# Altium PCB esp32v4.PcbDoc (part 3 of 3)
Units mm, origin at the board's own origin, x right, y up, seen from the top; angles counter-clockwise.
Board outline 100.25 x 100.25 mm, 2 copper layers (Top Layer, Bottom Layer), stack 1.536 mm thick; 107 components, 81 nets, 416 pads, 1990 vias.
Unrouted connection lines stored in the file: 16.
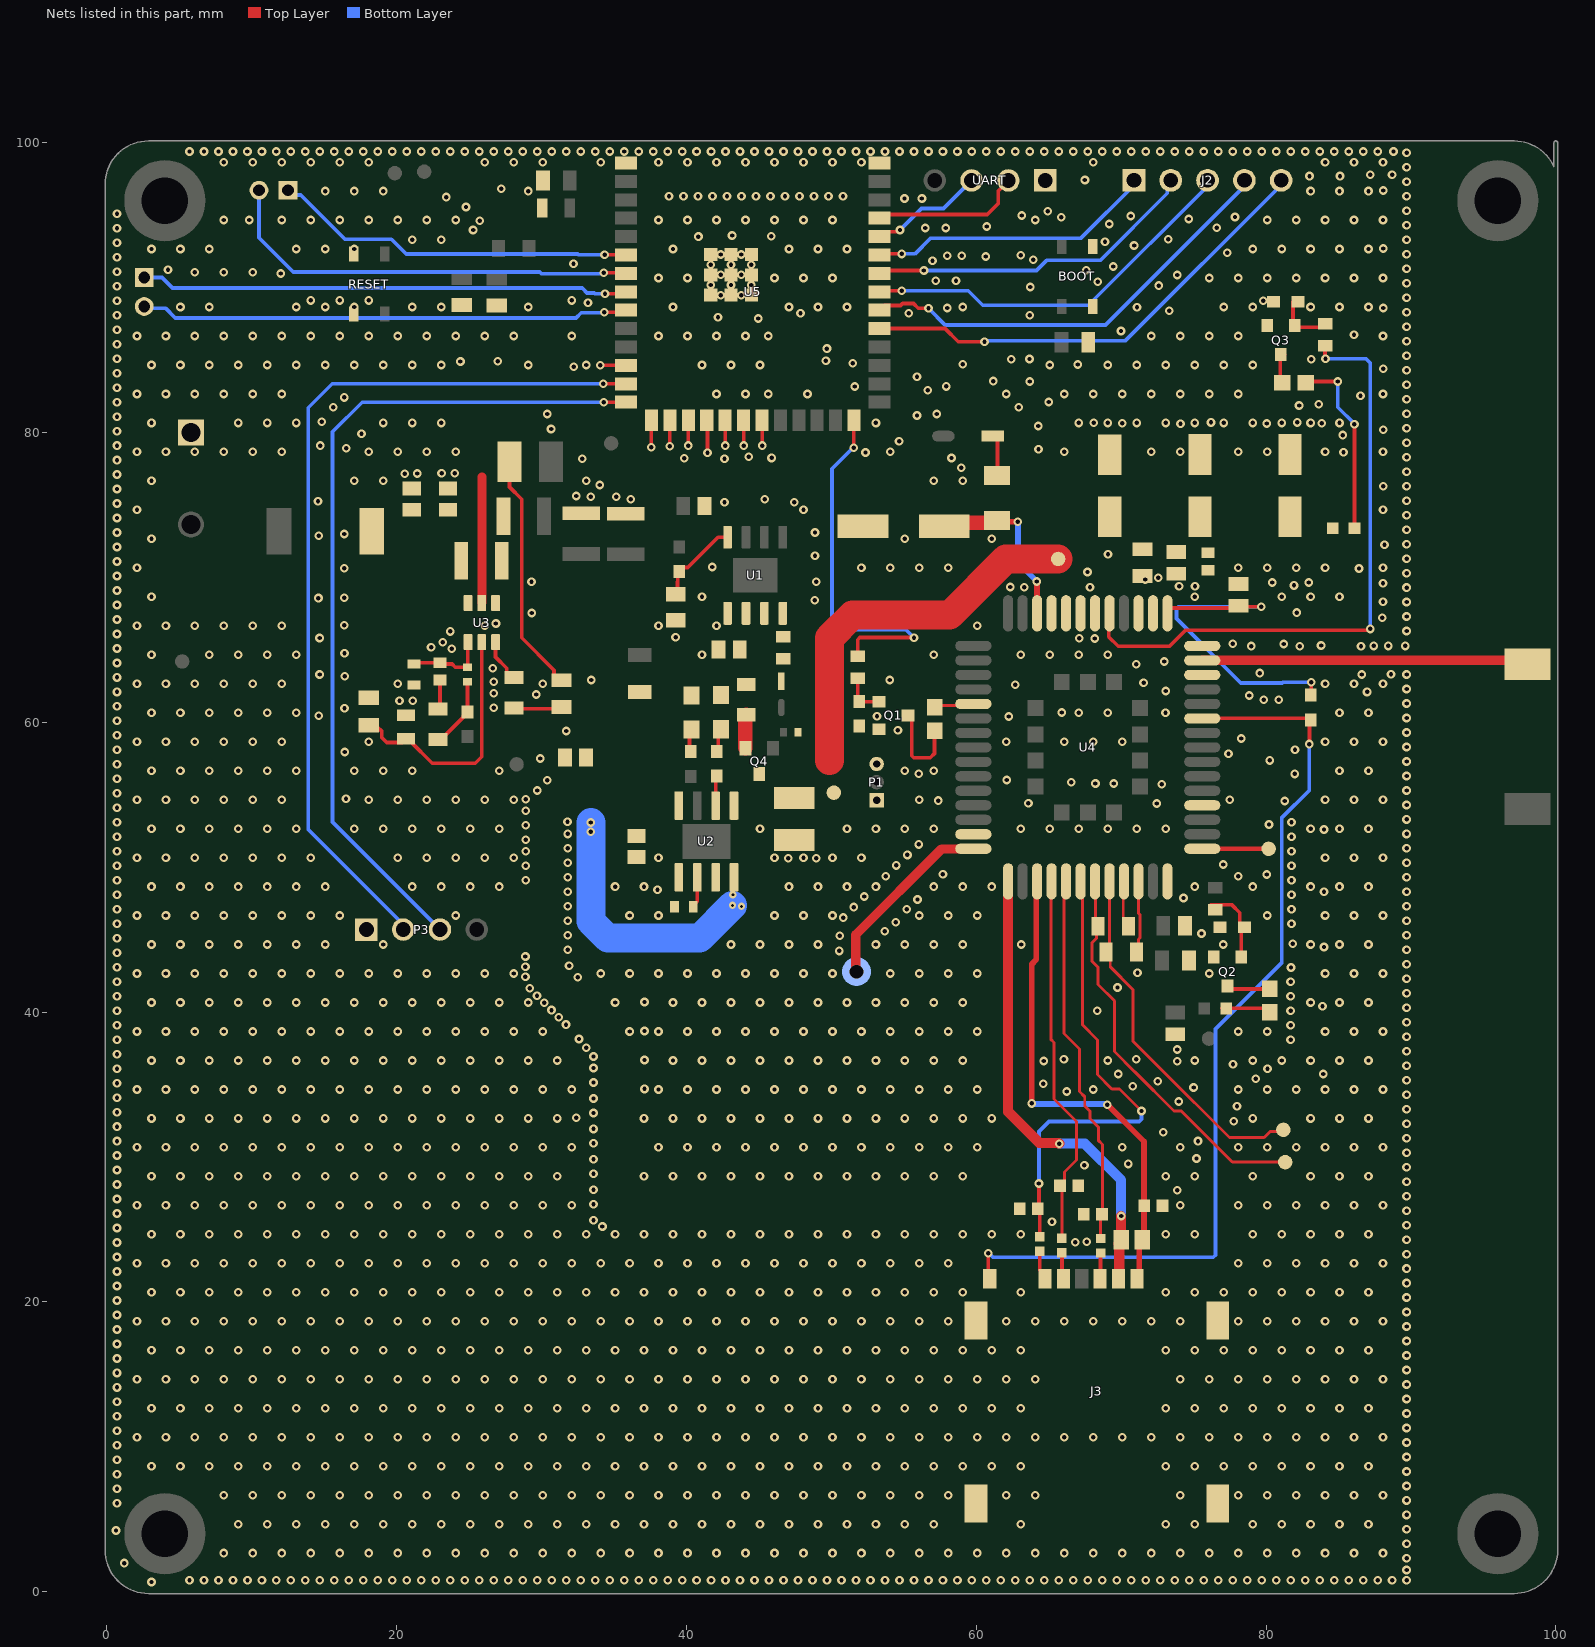
[diagram p2: the nets of this part, all layers, seen from the top]

## Via types
v1: diameter 0.6, hole 0.3, Top Layer to Bottom Layer, tented both sides, 1978 vias
v2: diameter 0.6, hole 0.3, Top Layer to Bottom Layer, tented bottom, 8 vias
v3: diameter 0.5, hole 0.2, Top Layer to Bottom Layer, tented both sides, 3 vias
v4: diameter 0.94, hole 0.94, Top Layer to Bottom Layer, tented both sides, 1 vias

## Nets (pads, with @x,y where several pads share a name; then routed paths per layer and width w, separated by ;. In a path a pad name is that pad's centre, name@x,y a point inside that pad or via, vN(x,y) a via of type N, cw(c..) or ccw(c..) an arc to the next point about the centre after c; other vN are vias at no path point) (continued)
GND: BOOT.3 BOOT.4 C1.2 C2.2 C3.2 C4.2 C5.2 C7.2 C8.2 C9.2 C10.2 C11.2 C12.2 C14.1 C15.2 C16.2 C17.2 C18.2 C19.2 C20.1 C21.1 C22.1 C23.2 C24.2 C25.2 C26.2 C27.2 C29.2 C30.2 C31.1 C32.2 C33.2 C34.2 J1.1 J3.G1 J3.G2 J3.G3 J3.G4 P1.1 P3.1 Q1.2 Q2.2 Q3.2 R3.2 R6.2 R12.2 R13.1 R16.2 R29.2 R30.2 R32.2 RESET.3 RESET.4 U1.1 U2.1 U2.3 U3.1 U4.14 U4.27 U4.31 U4.40 U4.42 U4.44 U4.45 U4.48 U4.49 U5.1 U5.40 U5.41 UART.1
  other v1: 3.075,0.665 5.7,0.8 6.7,0.8 7.7,0.8 8.7,0.8 9.7,0.8 10.7,0.8 11.7,0.8 12.7,0.8 13.7,0.8 14.7,0.8 15.7,0.8 16.7,0.8 17.7,0.8 18.7,0.8 19.7,0.8 20.7,0.8 21.7,0.8 22.7,0.8 23.7,0.8 24.7,0.8 25.7,0.8 26.7,0.8 27.7,0.8 28.7,0.8 29.7,0.8 30.7,0.8 31.7,0.8 32.7,0.8 33.7,0.8 34.7,0.8 35.7,0.8 36.7,0.8 37.7,0.8 38.7,0.8 39.7,0.8 40.7,0.8 41.7,0.8 42.7,0.8 43.7,0.8 44.7,0.8 45.7,0.8 46.7,0.8 47.7,0.8 48.7,0.8 49.7,0.8 50.7,0.8 51.7,0.8 52.7,0.8 53.7,0.8 54.7,0.8 55.7,0.8 56.7,0.8 57.7,0.8 58.7,0.8 59.7,0.8 60.7,0.8 61.7,0.8 62.7,0.8 63.7,0.8 64.7,0.8 65.7,0.8 66.7,0.8 67.7,0.8 68.7,0.8 69.7,0.8 70.7,0.8 71.7,0.8 72.7,0.8 73.7,0.8 74.7,0.8 75.7,0.8 76.7,0.8 77.7,0.8 78.7,0.8 79.7,0.8 80.7,0.8 81.7,0.8 82.7,0.8 83.7,0.8 84.7,0.8 85.7,0.8 86.7,0.8 87.7,0.8 88.7,0.8 89.7,0.8 89.7,1.5 1.2,1.975 89.7,2.3 8.075,2.665 10.075,2.665 12.075,2.665 14.075,2.665 16.075,2.665 18.075,2.665 20.075,2.665 22.075,2.665 24.075,2.665 26.075,2.665 28.075,2.665 30.075,2.665 32.075,2.665 34.075,2.665 36.075,2.665 38.075,2.665 40.075,2.665 42.075,2.665 44.075,2.665 46.075,2.665 48.075,2.665 50.075,2.665 52.075,2.665 54.075,2.665 56.075,2.665 58.075,2.665 60.075,2.665 62.075,2.665 64.075,2.665 66.075,2.665 68.075,2.665 70.075,2.665 72.075,2.665 74.075,2.665 76.075,2.665 78.075,2.665 80.075,2.665 82.075,2.665 84.075,2.665 86.075,2.665 88.075,2.665 89.7,3.3 0.625,4.225 89.7,4.3 9.075,4.665 11.075,4.665 13.075,4.665 15.075,4.665 17.075,4.665 19.075,4.665 21.075,4.665 23.075,4.665 25.075,4.665 27.075,4.665 29.075,4.665 31.075,4.665 33.075,4.665 35.075,4.665 37.075,4.665 39.075,4.665 41.075,4.665 43.075,4.665 45.075,4.665 47.075,4.665 49.075,4.665 51.075,4.665 53.075,4.665 55.075,4.665 57.075,4.665 63.075,4.665 73.075,4.665 75.075,4.665 79.075,4.665 81.075,4.665 83.075,4.665 85.075,4.665 87.075,4.665 89.7,5.3 0.7,6.1 89.7,6.3 8.075,6.665 10.075,6.665 12.075,6.665 14.075,6.665 16.075,6.665 18.075,6.665 20.075,6.665 22.075,6.665 24.075,6.665 26.075,6.665 28.075,6.665 30.075,6.665 32.075,6.665 34.075,6.665 36.075,6.665 38.075,6.665 40.075,6.665 42.075,6.665 44.075,6.665 46.075,6.665 48.075,6.665 50.075,6.665 52.075,6.665 54.075,6.665 56.075,6.665 58.075,6.665 62.075,6.665 64.075,6.665 74.075,6.665 78.075,6.665 80.075,6.665 82.075,6.665 84.075,6.665 86.075,6.665 88.075,6.665 0.7,7.1 89.7,7.3 0.7,8.1 89.7,8.3 3.075,8.665 5.075,8.665 7.075,8.665 9.075,8.665 11.075,8.665 13.075,8.665 15.075,8.665 17.075,8.665 19.075,8.665 21.075,8.665 23.075,8.665 25.075,8.665 27.075,8.665 29.075,8.665 31.075,8.665 33.075,8.665 35.075,8.665 37.075,8.665 39.075,8.665 41.075,8.665 43.075,8.665 45.075,8.665 47.075,8.665 49.075,8.665 51.075,8.665 53.075,8.665 55.075,8.665 57.075,8.665 59.075,8.665 61.075,8.665 63.075,8.665 73.075,8.665 75.075,8.665 77.075,8.665 79.075,8.665 81.075,8.665 83.075,8.665 85.075,8.665 87.075,8.665 0.7,9.1 89.7,9.3 0.7,10.1 89.7,10.3 2.075,10.665 4.075,10.665 6.075,10.665 8.075,10.665 10.075,10.665 12.075,10.665 14.075,10.665 16.075,10.665 18.075,10.665 20.075,10.665 22.075,10.665 24.075,10.665 26.075,10.665 28.075,10.665 30.075,10.665 32.075,10.665 34.075,10.665 36.075,10.665 38.075,10.665 40.075,10.665 42.075,10.665 44.075,10.665 46.075,10.665 48.075,10.665 50.075,10.665 52.075,10.665 54.075,10.665 56.075,10.665 58.075,10.665 60.075,10.665 62.075,10.665 64.075,10.665 66.075,10.665 68.075,10.665 70.075,10.665 72.075,10.665 74.075,10.665 76.075,10.665 78.075,10.665 80.075,10.665 82.075,10.665 84.075,10.665 86.075,10.665 88.075,10.665 0.7,11.1 89.7,11.3 0.7,12.1 89.7,12.3 3.075,12.665 5.075,12.665 7.075,12.665 9.075,12.665 11.075,12.665 13.075,12.665 15.075,12.665 17.075,12.665 19.075,12.665 21.075,12.665 23.075,12.665 25.075,12.665 27.075,12.665 29.075,12.665 31.075,12.665 33.075,12.665 35.075,12.665 37.075,12.665 39.075,12.665 41.075,12.665 43.075,12.665 45.075,12.665 47.075,12.665 49.075,12.665 51.075,12.665 53.075,12.665 55.075,12.665 57.075,12.665 59.075,12.665 61.075,12.665 63.075,12.665 73.075,12.665 75.075,12.665 77.075,12.665 79.075,12.665 81.075,12.665 83.075,12.665 85.075,12.665 87.075,12.665 0.7,13.1 89.7,13.3 0.7,14.1 89.7,14.3 2.075,14.665 4.075,14.665 6.075,14.665 8.075,14.665 10.075,14.665 12.075,14.665 14.075,14.665 16.075,14.665 18.075,14.665 20.075,14.665 22.075,14.665 24.075,14.665 26.075,14.665 28.075,14.665 30.075,14.665 32.075,14.665 34.075,14.665 36.075,14.665 38.075,14.665 40.075,14.665 42.075,14.665 44.075,14.665 46.075,14.665 48.075,14.665 50.075,14.665 52.075,14.665 54.075,14.665 56.075,14.665 58.075,14.665 60.075,14.665 62.075,14.665 64.075,14.665 74.075,14.665 76.075,14.665 78.075,14.665 80.075,14.665 82.075,14.665 84.075,14.665 86.075,14.665 88.075,14.665 0.7,15.1 89.7,15.3 0.7,16.1 89.7,16.3 3.075,16.665 5.075,16.665 7.075,16.665 9.075,16.665 11.075,16.665 13.075,16.665 15.075,16.665 17.075,16.665 19.075,16.665 21.075,16.665 23.075,16.665 25.075,16.665 27.075,16.665 29.075,16.665 31.075,16.665 33.075,16.665 35.075,16.665 37.075,16.665 39.075,16.665 41.075,16.665 43.075,16.665 45.075,16.665 47.075,16.665 49.075,16.665 51.075,16.665 53.075,16.665 55.075,16.665 57.075,16.665 59.075,16.665 61.075,16.665 63.075,16.665 73.075,16.665 75.075,16.665 77.075,16.665 79.075,16.665 81.075,16.665 83.075,16.665 85.075,16.665 87.075,16.665 0.7,17.1 89.7,17.3 0.7,18.1 89.7,18.3 2.075,18.665 4.075,18.665 6.075,18.665 8.075,18.665 10.075,18.665 12.075,18.665 14.075,18.665 16.075,18.665 18.075,18.665 20.075,18.665 22.075,18.665 24.075,18.665 26.075,18.665 28.075,18.665 30.075,18.665 32.075,18.665 34.075,18.665 36.075,18.665 38.075,18.665 40.075,18.665 42.075,18.665 44.075,18.665 46.075,18.665 48.075,18.665 50.075,18.665 52.075,18.665 54.075,18.665 56.075,18.665 58.075,18.665 62.075,18.665 64.075,18.665 66.075,18.665 68.075,18.665 70.075,18.665 72.075,18.665 74.075,18.665 78.075,18.665 80.075,18.665 82.075,18.665 84.075,18.665 86.075,18.665 88.075,18.665 0.7,19.1 89.7,19.3 0.7,20.1 89.7,20.3 3.075,20.665 5.075,20.665 7.075,20.665 9.075,20.665 11.075,20.665 13.075,20.665 15.075,20.665 17.075,20.665 19.075,20.665 21.075,20.665 23.075,20.665 25.075,20.665 27.075,20.665 29.075,20.665 31.075,20.665 33.075,20.665 35.075,20.665 37.075,20.665 39.075,20.665 41.075,20.665 43.075,20.665 45.075,20.665 47.075,20.665 49.075,20.665 51.075,20.665 53.075,20.665 55.075,20.665 57.075,20.665 59.075,20.665 63.075,20.665 73.075,20.665 75.075,20.665 77.075,20.665 79.075,20.665 81.075,20.665 83.075,20.665 85.075,20.665 87.075,20.665 0.7,21.1 89.7,21.3 0.7,22.1 89.7,22.3 2.075,22.665 4.075,22.665 6.075,22.665 8.075,22.665 10.075,22.665 12.075,22.665 14.075,22.665 16.075,22.665 18.075,22.665 20.075,22.665 22.075,22.665 24.075,22.665 26.075,22.665 28.075,22.665 30.075,22.665 32.075,22.665 34.075,22.665 36.075,22.665 38.075,22.665 40.075,22.665 42.075,22.665 44.075,22.665 46.075,22.665 48.075,22.665 50.075,22.665 52.075,22.665 54.075,22.665 56.075,22.665 58.075,22.665 78.075,22.665 80.075,22.665 82.075,22.665 84.075,22.665 86.075,22.665 88.075,22.665 0.7,23.1 89.7,23.3 0.7,24.1 66.825,24.125 67.625,24.15 89.7,24.3 3.075,24.665 5.075,24.665 7.075,24.665 9.075,24.665 11.075,24.665 13.075,24.665 15.075,24.665 17.075,24.665 19.075,24.665 21.075,24.665 23.075,24.665 25.075,24.665 27.075,24.665 29.075,24.665 31.075,24.665 33.075,24.665 35.075,24.665 37.075,24.665 39.075,24.665 41.075,24.665 43.075,24.665 45.075,24.665 47.075,24.665 49.075,24.665 51.075,24.665 53.075,24.665 55.075,24.665 57.075,24.665 59.075,24.665 61.075,24.665 63.075,24.665 73.075,24.665 75.075,24.665 79.075,24.665 81.075,24.665 83.075,24.665 85.075,24.665 87.075,24.665 0.7,25.1 34.2,25.2 89.7,25.3 65.225,25.525 33.585,25.64 0.7,26.1 89.7,26.3 2.075,26.665 4.075,26.665 6.075,26.665 8.075,26.665 10.075,26.665 12.075,26.665 14.075,26.665 16.075,26.665 18.075,26.665 20.075,26.665 22.075,26.665 24.075,26.665 26.075,26.665 28.075,26.665 30.075,26.665 32.075,26.665 74.075,26.665 78.075,26.665 80.075,26.665 82.075,26.665 84.075,26.665 86.075,26.665 88.075,26.665 33.585,26.74 0.7,27.1 89.7,27.3 73.875,27.7 33.585,27.74 0.7,28.1 89.7,28.3 3.075,28.665 5.075,28.665 7.075,28.665 9.075,28.665 11.075,28.665 13.075,28.665 15.075,28.665 17.075,28.665 19.075,28.665 21.075,28.665 23.075,28.665 25.075,28.665 27.075,28.665 29.075,28.665 31.075,28.665 37.075,28.665 39.075,28.665 41.075,28.665 43.075,28.665 45.075,28.665 47.075,28.665 49.075,28.665 51.075,28.665 53.075,28.665 55.075,28.665 57.075,28.665 59.075,28.665 73.075,28.665 75.075,28.665 79.075,28.665 83.075,28.665 85.075,28.665 87.075,28.665 33.585,28.84 0.7,29.1 89.7,29.3 67.465,29.429 70.5,29.525 33.585,29.84 75.2,29.9 0.7,30.1 89.7,30.3 2.075,30.665 4.075,30.665 6.075,30.665 8.075,30.665 10.075,30.665 12.075,30.665 14.075,30.665 16.075,30.665 18.075,30.665 20.075,30.665 22.075,30.665 24.075,30.665 26.075,30.665 28.075,30.665 30.075,30.665 32.075,30.665 38.075,30.665 40.075,30.665 42.075,30.665 44.075,30.665 46.075,30.665 48.075,30.665 50.075,30.665 52.075,30.665 54.075,30.665 56.075,30.665 58.075,30.665 60.075,30.665 70.075,30.665 74.075,30.665 78.075,30.665 80.075,30.665 82.075,30.665 84.075,30.665 86.075,30.665 88.075,30.665 33.585,30.94 0.7,31.1 75.3,31.1 89.7,31.3 72.9,31.7 33.585,31.94 0.7,32.1 89.7,32.3 77.775,32.475 3.075,32.665 5.075,32.665 7.075,32.665 9.075,32.665 11.075,32.665 13.075,32.665 15.075,32.665 17.075,32.665 19.075,32.665 21.075,32.665 23.075,32.665 25.075,32.665 27.075,32.665 29.075,32.665 31.075,32.665 37.075,32.665 39.075,32.665 41.075,32.665 43.075,32.665 45.075,32.665 47.075,32.665 49.075,32.665 51.075,32.665 53.075,32.665 55.075,32.665 57.075,32.665 59.075,32.665 61.075,32.665 79.075,32.665 83.075,32.665 85.075,32.665 87.075,32.665 32.4,32.7 33.585,33.04 0.7,33.1 89.7,33.3 78,33.5 73.975,33.829 33.585,34.04 0.7,34.1 89.7,34.3 66.25,34.525 2.075,34.665 4.075,34.665 6.075,34.665 8.075,34.665 10.075,34.665 12.075,34.665 14.075,34.665 16.075,34.665 18.075,34.665 20.075,34.665 22.075,34.665 24.075,34.665 26.075,34.665 28.075,34.665 30.075,34.665 32.075,34.665 38.075,34.665 40.075,34.665 42.075,34.665 44.075,34.665 46.075,34.665 48.075,34.665 50.075,34.665 52.075,34.665 54.075,34.665 56.075,34.665 58.075,34.665 60.075,34.665 68.075,34.665 78.075,34.665 80.075,34.665 82.075,34.665 84.075,34.665 86.075,34.665 88.075,34.665 37.1,34.7 75,34.8 70.792,34.894 64.625,35.05 0.7,35.1 33.585,35.14 72.521,35.221 89.7,35.3 79.3,35.4 69.8,35.725 83.95,35.725 0.7,36.1 80.1,36.1 33.585,36.14 89.7,36.3 77.725,36.4 73.875,36.6 64.65,36.625 3.075,36.665 5.075,36.665 7.075,36.665 9.075,36.665 11.075,36.665 13.075,36.665 15.075,36.665 17.075,36.665 19.075,36.665 21.075,36.665 23.075,36.665 25.075,36.665 27.075,36.665 29.075,36.665 31.075,36.665 39.075,36.665 41.075,36.665 43.075,36.665 45.075,36.665 47.075,36.665 49.075,36.665 51.075,36.665 53.075,36.665 55.075,36.665 57.075,36.665 59.075,36.665 69.075,36.665 75.075,36.665 79.075,36.665 81.075,36.665 83.075,36.665 85.075,36.665 87.075,36.665 37.1,36.7 66.05,36.75 71.05,36.75 33.585,36.94 0.7,37.1 89.7,37.3 73.875,37.425 33.085,37.54 0.7,38.1 81.694,38.1 32.585,38.14 89.7,38.3 2.075,38.665 4.075,38.665 6.075,38.665 8.075,38.665 10.075,38.665 12.075,38.665 14.075,38.665 16.075,38.665 18.075,38.665 20.075,38.665 22.075,38.665 24.075,38.665 26.075,38.665 28.075,38.665 30.075,38.665 36.075,38.665 38.075,38.665 40.075,38.665 42.075,38.665 44.075,38.665 46.075,38.665 48.075,38.665 50.075,38.665 52.075,38.665 54.075,38.665 56.075,38.665 58.075,38.665 60.075,38.665 78.075,38.665 80.075,38.665 84.075,38.665 86.075,38.665 88.075,38.665 37.1,38.7 0.7,39.1 81.694,39.1 31.685,39.14 89.7,39.3 31.185,39.64 0.7,40.1 68.35,40.1 81.694,40.1 30.685,40.14 89.7,40.3 83.9,40.4 30.185,40.64 3.075,40.665 5.075,40.665 7.075,40.665 9.075,40.665 11.075,40.665 13.075,40.665 15.075,40.665 17.075,40.665 19.075,40.665 21.075,40.665 23.075,40.665 25.075,40.665 27.075,40.665 29.075,40.665 35.075,40.665 39.075,40.665 41.075,40.665 43.075,40.665 45.075,40.665 47.075,40.665 49.075,40.665 51.075,40.665 53.075,40.665 55.075,40.665 57.075,40.665 59.075,40.665 83.075,40.665 85.075,40.665 87.075,40.665 37.1,40.7 0.7,41.1 81.694,41.1 29.685,41.14 89.7,41.3 29.185,41.64 69.75,41.7 0.7,42.1 81.694,42.1 89.7,42.3 32.5,42.4 28.885,42.44 2.075,42.665 4.075,42.665 6.075,42.665 8.075,42.665 10.075,42.665 12.075,42.665 14.075,42.665 16.075,42.665 18.075,42.665 20.075,42.665 22.075,42.665 24.075,42.665 26.075,42.665 28.075,42.665 34.075,42.665 36.075,42.665 38.075,42.665 40.075,42.665 42.075,42.665 44.075,42.665 46.075,42.665 48.075,42.665 50.075,42.665 54.075,42.665 56.075,42.665 58.075,42.665 60.075,42.665 76.075,42.665 84.075,42.665 86.075,42.665 88.075,42.665 71.125,42.725 81.718,43.076 0.7,43.1 28.885,43.14 31.9,43.2 89.7,43.3 28.885,43.84 0.7,44.1 50.55,44.225 31.8,44.3 89.7,44.3 84,44.5 3.075,44.665 5.075,44.665 7.075,44.665 9.075,44.665 11.075,44.665 13.075,44.665 15.075,44.665 19.075,44.665 43.075,44.665 45.075,44.665 47.075,44.665 49.075,44.665 53.075,44.665 55.075,44.665 57.075,44.665 59.075,44.665 63.104,44.665 77.049,44.665 83.075,44.665 85.075,44.665 87.075,44.665 81.85,44.725 0.7,45.1 50.575,45.275 31.8,45.3 89.7,45.3 75.55,45.425 53.675,45.575 0.7,46.1 81.756,46.1 54.45,46.2 31.8,46.3 89.7,46.3 50.825,46.525 2.075,46.665 4.075,46.665 6.075,46.665 8.075,46.665 10.075,46.665 12.075,46.665 14.075,46.665 16.075,46.665 24.075,46.665 36.075,46.665 38.075,46.665 46.075,46.665 48.075,46.665 50.075,46.665 56.075,46.665 58.075,46.665 60.075,46.665 80.075,46.665 84.075,46.665 86.075,46.665 88.075,46.665 0.7,47.1 55.2,47.1 81.756,47.1 51.55,47.25 31.8,47.3 89.7,47.3 55.95,47.775 74.3,47.875 52.275,47.975 0.7,48.1 81.756,48.1 31.8,48.3 84,48.3 89.7,48.3 38,48.45 3.075,48.665 5.075,48.665 7.075,48.665 9.075,48.665 11.075,48.665 13.075,48.665 15.075,48.665 21.075,48.665 23.075,48.665 25.075,48.665 27.075,48.665 35.075,48.665 37.075,48.665 47.075,48.665 49.075,48.665 51.075,48.665 53.075,48.665 57.075,48.665 59.075,48.665 61.075,48.665 75.075,48.665 79.075,48.665 83.075,48.665 85.075,48.665 87.075,48.665 0.7,49.1 28.9,49.1 81.756,49.1 31.8,49.3 89.7,49.3 53.75,49.375 78.075,49.375 80.05,49.5 57.7,49.525 0.7,50.1 28.9,50.1 81.756,50.1 54.475,50.125 77.041,50.184 31.8,50.3 89.7,50.3 47.025,50.625 48.95,50.625 2.075,50.665 4.075,50.665 6.075,50.665 8.075,50.665 10.075,50.665 12.075,50.665 14.075,50.665 20.075,50.665 22.075,50.665 24.075,50.665 26.075,50.665 28.075,50.665 38.075,50.665 46.075,50.665 48.075,50.665 50.075,50.665 52.075,50.665 84.075,50.665 86.075,50.665 88.075,50.665 55.25,50.85 0.7,51.1 28.9,51.1 81.756,51.1 31.8,51.3 89.7,51.3 56.025,51.575 28.9,51.9 0.7,52.1 81.756,52.1 31.8,52.3 89.7,52.3 84,52.6 3.075,52.665 5.075,52.665 7.075,52.665 9.075,52.665 11.075,52.665 13.075,52.665 17.075,52.665 19.075,52.665 21.075,52.665 23.075,52.665 25.075,52.665 27.075,52.665 45.075,52.665 51.075,52.665 53.075,52.665 55.075,52.665 57.075,52.665 63.075,52.665 65.075,52.665 67.075,52.665 69.075,52.665 71.075,52.665 73.075,52.665 83.075,52.665 85.075,52.665 87.075,52.665 28.9,52.9 80.2,52.95 0.7,53.1 81.756,53.1 31.785,53.14 89.7,53.3 28.9,53.9 0.7,54.1 89.7,54.3 72.45,54.4 63.6,54.425 81.284,54.572 57.375,54.6 2.075,54.665 4.075,54.665 6.075,54.665 8.075,54.665 10.075,54.665 12.075,54.665 18.075,54.665 20.075,54.665 22.075,54.665 24.075,54.665 26.075,54.665 28.075,54.665 56.075,54.665 77.5,54.65 84.075,54.665 86.075,54.665 88.075,54.665 28.9,54.7 16.5,54.725 0.7,55.1 29.7,55.3 89.7,55.3 72.8,55.725 68.225,55.775 69.5,55.775 66.55,55.875 30.4,56 62.1,56.025 0.7,56.1 89.7,56.3 56.025,56.45 81.985,56.441 3.075,56.665 5.075,56.665 7.075,56.665 9.075,56.665 11.075,56.665 13.075,56.665 17.075,56.665 19.075,56.665 21.075,56.665 27.075,56.665 55.075,56.665 57.075,56.665 85.075,56.665 87.075,56.665 0.7,57.1 89.7,57.3 80.263,57.373 29.9,57.5 77.413,57.838 16.425,57.95 0.7,58.1 81.996,58.1 89.7,58.3 2.075,58.665 4.075,58.665 6.075,58.665 8.075,58.665 10.075,58.665 12.075,58.665 18.075,58.665 62.075,58.665 66.075,58.665 68.075,58.665 70.075,58.665 84.075,58.665 86.075,58.665 88.075,58.665 78.293,58.883 0.7,59.1 89.7,59.3 31.7,59.4 54.594,59.45 0.7,60.1 89.7,60.3 62.25,60.4 53.15,60.425 14.625,60.45 3.075,60.665 5.075,60.665 7.075,60.665 9.075,60.665 11.075,60.665 13.075,60.665 67.075,60.665 69.075,60.665 73.066,60.657 85.075,60.665 87.075,60.665 65.9,60.675 16.4,60.975 26.7,61 0.7,61.1 89.7,61.3 20.2,61.5 21.1,61.5 79.848,61.569 80.882,61.569 78.836,61.852 29.625,61.925 26.7,62 0.7,62.1 86.975,62.1 73.088,62.163 89.7,62.3 62.7,62.6 2.075,62.665 4.075,62.665 6.075,62.665 8.075,62.665 10.075,62.665 12.075,62.665 20.075,62.665 30.075,62.665 84.075,62.665 86.075,62.665 88.075,62.665 71.55,62.725 26.7,62.8 33.425,62.925 54.025,62.925 0.7,63.1 16.425,63.175 14.681,63.3 86.6,63.3 89.7,63.3 88.625,63.325 79.567,63.399 26.637,63.737 71.05,64 0.7,64.1 72.976,64.201 3.075,64.665 7.075,64.665 9.075,64.665 11.075,64.665 13.075,64.665 41.075,64.665 57.075,64.665 63.075,64.665 65.075,64.665 67.075,64.665 69.075,64.665 16.4,64.775 23.8,65.075 0.7,65.1 22.375,65.175 78.987,65.263 82.325,65.25 86.55,65.25 87.425,65.275 88.425,65.275 89.6,65.275 83.8,65.3 81.228,65.403 77.7,65.425 23.175,65.525 68.181,65.781 67.1,65.8 14.681,65.825 39.25,65.875 0.7,66.1 23.7,66.275 89.7,66.3 2.075,66.665 4.075,66.665 6.075,66.665 8.075,66.665 10.075,66.665 12.075,66.665 26.075,66.665 38.075,66.665 42.075,66.665 60.075,66.665 16.375,66.7 26.85,66.825 0.7,67.1 88.031,67.225 89.7,67.3 29.331,67.55 82.125,67.575 0.7,68.1 89.7,68.3 88.075,68.325 48.85,68.425 14.6,68.575 16.375,68.6 3.075,68.665 41.075,68.665 75.075,68.665 81.075,68.665 83.075,68.665 85.075,68.665 0.7,69.1 89.7,69.3 63.322,69.325 67.847,69.329 62.357,69.342 74,69.4 75.1,69.4 81.925,69.45 88.075,69.6 80.425,69.65 82.938,69.656 29.306,69.7 48.95,69.7 71.657,69.857 72.569,69.969 0.7,70.1 89.7,70.3 67.675,70.375 86.413,70.623 16.375,70.625 2.075,70.665 52.075,70.665 54.075,70.665 56.075,70.665 58.075,70.665 78.075,70.665 80.075,70.665 82.075,70.665 84.075,70.665 88.075,70.665 41.781,70.725 0.7,71.1 89.7,71.3 48.875,71.5 69.094,71.594 0.7,72.1 88.175,72.25 89.7,72.3 3.075,72.665 55.075,72.665 61.075,72.665 14.625,72.875 16.375,73 0.7,73.1 48.875,73.1 89.7,73.3 0.7,74.1 89.7,74.3 2.075,74.665 48.075,74.665 88.075,74.665 0.7,75.1 42.625,75.2 47.45,75.2 14.575,75.25 89.7,75.3 36.151,75.401 45.4,75.401 33.4,75.575 35.145,75.567 32.4,75.625 0.7,76.1 88.1,76.3 89.7,76.3 34.024,76.383 3.075,76.665 17.075,76.665 19.075,76.665 33.075,76.665 57.075,76.665 59.075,76.665 0.7,77.1 20.55,77.15 21.425,77.175 23.1,77.2 24,77.2 89.7,77.3 58.973,77.563 0.7,78.1 32.8,78.2 42.625,78.2 39.85,78.225 45.875,78.25 58.289,78.248 89.7,78.3 44.301,78.322 52.356,78.62 85.35,78.65 2.075,78.665 4.075,78.665 6.075,78.665 8.075,78.665 10.075,78.665 12.075,78.665 18.075,78.665 20.075,78.665 22.075,78.665 24.075,78.665 54.075,78.665 66.075,78.665 72.075,78.665 74.075,78.665 78.075,78.665 80.075,78.665 84.075,78.665 88.075,78.665 64.3,78.85 16.525,78.925 0.7,79.1 14.725,79.1 89.7,79.3 54.675,79.4 85.3,79.825 17.575,79.925 0.7,80.1 88.1,80.2 30.658,80.248 89.7,80.3 64.275,80.45 74.1,80.6 80.05,80.625 70.075,80.65 83.85,80.65 3.075,80.665 9.075,80.665 11.075,80.665 13.075,80.665 19.075,80.665 21.075,80.665 23.075,80.665 53.075,80.665 67.075,80.665 68.1,80.675 69.075,80.665 71.075,80.665 73.075,80.665 75.075,80.665 77.075,80.665 79.075,80.665 81.075,80.665 83.075,80.665 85.075,80.665 76.2,80.7 82.15,80.7 14.825,80.75 0.7,81.1 55.913,81.175 30.4,81.275 57.282,81.278 89.7,81.3 62.928,81.739 15.625,81.75 82.281,81.869 83.643,81.943 0.7,82.1 65.007,82.107 89.7,82.3 16.375,82.425 86.515,82.543 2.075,82.665 4.075,82.665 6.075,82.665 8.075,82.665 10.075,82.665 12.075,82.665 42.075,82.665 44.075,82.665 45.644,82.665 48.356,82.665 62.075,82.665 66.075,82.665 68.075,82.665 70.075,82.665 72.075,82.665 74.075,82.665 76.075,82.665 78.075,82.665 88.075,82.665 56.65,82.925 0.7,83.1 51.625,83.175 57.928,83.184 89.7,83.3 63.7,83.525 61.184,83.552 55.913,83.85 0.7,84.1 89.7,84.3 88.1,84.4 32.225,84.55 3.075,84.665 5.075,84.665 7.075,84.665 9.075,84.665 11.075,84.665 13.075,84.665 15.075,84.665 17.075,84.665 19.075,84.665 21.075,84.665 23.075,84.665 29.075,84.665 33.075,84.665 41.075,84.665 43.075,84.665 45.075,84.665 65.075,84.665 69.075,84.665 71.075,84.665 73.075,84.665 75.075,84.665 77.075,84.665 79.075,84.665 59.07,84.719 67,84.7 51.475,84.775 24.4,84.9 26.975,84.925 49.625,84.95 62.425,85.05 83.125,85.05 63.675,85.075 0.7,85.1 89.7,85.3 49.694,85.795 0.7,86.1 89.7,86.3 2.075,86.665 4.075,86.665 6.075,86.665 8.075,86.665 10.075,86.665 12.075,86.665 14.075,86.665 16.075,86.665 18.075,86.665 20.075,86.665 22.075,86.665 24.075,86.665 26.075,86.665 28.075,86.665 32.075,86.665 38.075,86.665 40.075,86.665 42.075,86.665 44.075,86.665 45.644,86.665 72.075,86.665 74.075,86.665 76.075,86.665 78.075,86.665 88.075,86.665 86.075,86.753 69.993,87.006 0.7,87.1 89.7,87.3 44.95,87.875 42.175,87.95 0.7,88.1 63.7,88.106 47.875,88.231 55.35,88.231 89.7,88.3 73.327,88.414 58,88.6 88.1,88.6 71.097,88.643 5.075,88.665 7.075,88.665 13.075,88.665 15.075,88.665 17.075,88.665 21.075,88.665 23.075,88.665 29.075,88.665 39.075,88.665 47.075,88.665 49.075,88.665 51.075,88.665 59.075,88.665 77.075,88.665 79.075,88.665 83.075,88.665 85.075,88.665 87.075,88.665 33.2,88.952 0.7,89.1 79.8,89.1 14.075,89.119 16.075,89.119 18.075,89.119 32.075,89.119 89.7,89.3 42.377,89.485 43.777,89.485 63.725,90.05 0.7,90.1 72.597,90.143 41.677,90.185 43.077,90.185 44.477,90.185 89.7,90.3 68.394,90.406 57.2,90.47 58.6,90.47 38.075,90.665 40.075,90.665 46.075,90.665 48.075,90.665 50.075,90.665 76.075,90.665 78.075,90.665 80.075,90.665 82.075,90.665 84.075,90.665 86.075,90.665 88.075,90.665 42.377,90.885 43.777,90.885 73.864,90.877 11.997,90.978 6.075,91.056 8.075,91.056 10.075,91.056 0.7,91.1 67.6,91.2 4.216,91.239 89.7,91.3 69.452,91.465 41.677,91.585 43.077,91.585 44.477,91.585 32.2,91.64 56.985,91.867 63.931,91.919 0.7,92.1 60.65,92.15 58,92.2 59,92.2 63.075,92.23 42.377,92.285 43.777,92.285 89.7,92.3 77.327,92.414 3.075,92.665 5.075,92.665 7.075,92.665 13.075,92.665 15.075,92.665 17.075,92.665 39.075,92.665 47.075,92.665 49.075,92.665 51.075,92.665 79.075,92.665 81.075,92.665 83.075,92.665 85.075,92.665 87.075,92.665 88.1,92.7 70.894,92.906 0.7,93.1 68.883,93.171 21.075,93.297 23.075,93.297 89.7,93.3 73.257,93.343 40.825,93.525 45.85,93.55 43.15,93.6 25.274,93.981 0.7,94.1 56.472,94.114 57.9,94.114 76.597,94.143 60.725,94.225 89.7,94.3 69.177,94.398 25.728,94.628 8.075,94.665 9.819,94.665 12.075,94.665 14.075,94.665 16.075,94.665 18.075,94.665 20.075,94.665 22.075,94.665 24.075,94.665 38.075,94.665 40.075,94.665 42.075,94.665 44.075,94.665 46.075,94.665 48.075,94.665 50.075,94.665 64.075,94.665 80.075,94.665 82.075,94.665 84.075,94.665 86.075,94.665 88.075,94.665 74.657,94.743 65.876,94.864 77.864,94.877 70.656,94.944 63.15,94.975 0.7,95.1 64.925,95.275 89.7,95.3 24.79,95.565 55.05,96.15 56.25,96.15 23.425,96.25 38.8,96.3 39.8,96.3 40.8,96.3 41.8,96.3 42.8,96.3 43.8,96.3 44.8,96.3 45.8,96.3 46.8,96.3 47.8,96.3 48.8,96.3 49.8,96.3 50.8,96.3 89.7,96.3 15.075,96.665 17.075,96.665 19.075,96.665 29.075,96.665 83.075,96.665 85.075,96.665 87.075,96.665 88.1,96.7 27.227,96.817 89.7,97.3 67.5,97.425 83,97.7 85.1,97.7 87.2,97.8 88.7,97.8 89.7,98.3 8.075,98.665 10.075,98.665 12.075,98.665 14.075,98.665 16.075,98.665 18.075,98.665 26.075,98.665 28.075,98.665 30.075,98.665 34.075,98.665 38.075,98.665 40.075,98.665 42.075,98.665 44.075,98.665 46.075,98.665 48.075,98.665 50.075,98.665 52.075,98.665 68.075,98.665 84.075,98.665 86.075,98.665 88.075,98.665 89.7,99.3 5.7,99.4 6.7,99.4 7.7,99.4 8.7,99.4 9.7,99.4 10.7,99.4 11.7,99.4 12.7,99.4 13.7,99.4 14.7,99.4 15.7,99.4 16.7,99.4 17.7,99.4 18.7,99.4 19.7,99.4 20.7,99.4 21.7,99.4 22.7,99.4 23.7,99.4 24.7,99.4 25.7,99.4 26.7,99.4 27.7,99.4 28.7,99.4 29.7,99.4 30.7,99.4 31.7,99.4 32.7,99.4 33.7,99.4 34.7,99.4 35.7,99.4 36.7,99.4 37.7,99.4 38.7,99.4 39.7,99.4 40.7,99.4 41.7,99.4 42.7,99.4 43.7,99.4 44.7,99.4 45.7,99.4 46.7,99.4 47.7,99.4 48.7,99.4 49.7,99.4 50.7,99.4 51.7,99.4 52.7,99.4 53.7,99.4 54.7,99.4 55.7,99.4 56.7,99.4 57.7,99.4 58.7,99.4 59.7,99.4 60.7,99.4 61.7,99.4 62.7,99.4 63.7,99.4 64.7,99.4 65.7,99.4 66.7,99.4 67.7,99.4 68.7,99.4 69.7,99.4 70.7,99.4 71.7,99.4 72.7,99.4 73.7,99.4 74.7,99.4 75.7,99.4 76.7,99.4 77.7,99.4 78.7,99.4 79.7,99.4 80.7,99.4 81.7,99.4 82.7,99.4 83.7,99.4 84.7,99.4 85.7,99.4 86.7,99.4 87.7,99.4 88.8,99.4
GNNS_RX: R20.1 TP9.TP? U4.23 | length 25.3
  Top Layer w0.2: U4.23@69.2,49.025 69.2,46.726 69.204,46.722 69.204,45.128 69.2,45.124 69.2,44.4 R20.1@68.95,44.15 69.25,43.85 69.25,43.125 70.825,41.55 70.825,37.99 72.754,36.061 77.469,31.346 79.871,31.346 80.3,31.775 81.1,31.775 TP9.TP?@81.2,31.875
GNNS_TX: R18.1 TP10.TP? U4.22 | length 27.5
  Top Layer w0.2: U4.22@68.2,49.025 68.225,49 R18.1@68.225,45.925 ; R18.1@68.4,45.925 68.292,45.817 68.292,45.092 68,44.801 68,43.499 68.4,43.099 68.4,41.917 69.536,40.781 69.536,37.279 70.933,35.883 70.934,35.883 73.642,33.175 74.15,33.175 77.675,29.65 TP10.TP?@81.325,29.65
GNSS_ANT: E1.1 U4.15 | length 13.1
  Top Layer w0.643: v4(51.738,42.794) 51.689,42.843 51.689,45.339 57.61,51.26 U4.15@59.747,51.26
GNSS_VCC_EN: TP11.TP? U4.28 | length 4.6
  Top Layer w0.3: U4.28@75.6,51.275 TP11.TP?@80.175,51.275
IO3: U5.15 | length 1.9
  Top Layer w0.254: v2(37.571,78.996) 37.571,80.824 U5.15@37.592,80.845
IO6: J4.1 U5.6 | length 25.2
  Top Layer w0.254: v1(34.35,92.275) 35.807,92.275 U5.6@35.827,92.255
  Bottom Layer w0.254: J4.1@12.5,96.725 12.83,96.395 13.382,96.395 16.431,93.346 19.636,93.346 20.661,92.321 32.482,92.321 32.528,92.275 v1(34.35,92.275)
IO7: J4.2 U5.7 | length 29.7
  Top Layer w0.254: v1(34.3,91.025) 35.787,91.025 U5.7@35.827,90.985
  Bottom Layer w0.254: J4.2@10.5,96.725 10.5,93.438 12.863,91.075 29.875,91.075 29.991,90.959 34.234,90.959 v1(34.3,91.025)
IO8: U5.12 | length 1.8
  Top Layer w0.254: v2(34.05,84.65) 35.812,84.65 U5.12@35.827,84.635
IO9: U5.17 | length 1.7
  Top Layer w0.254: v2(40.125,79.1) 40.125,80.838 U5.17@40.132,80.845
IO10: U5.18 | length 2.3
  Top Layer w0.254: U5.18@41.402,80.845 41.45,80.797 v2(41.45,78.6)
IO11: U5.19 | length 1.7
  Top Layer w0.254: U5.19@42.672,80.845 42.675,80.842 v2(42.675,79.1)
IO12: U5.20 | length 1.7
  Top Layer w0.254: U5.20@43.942,80.845 43.95,80.837 v2(43.95,79.1)
IO13: U5.21 | length 1.8
  Top Layer w0.254: U5.21@45.212,80.845 45.225,80.832 v2(45.225,79.1)
IO15: J5.1 U5.8 | length 33.8
  Top Layer w0.254: v1(34.375,89.575) 35.687,89.575 U5.8@35.827,89.715
  Bottom Layer w0.254: J5.1@2.575,90.7 3.8,90.7 4.525,89.975 32.8,89.975 33.142,89.633 33.636,89.633 33.694,89.575 v1(34.375,89.575)
IO16: J5.2 U5.9 | length 33.8
  Top Layer w0.254: v1(34.325,88.3) 35.682,88.3 U5.9@35.827,88.445
  Bottom Layer w0.254: J5.2@2.575,88.7 2.688,88.587 4.038,88.587 4.725,87.9 32.375,87.9 32.746,88.271 34.296,88.271 v1(34.325,88.3)
IO19: P3.2 U5.13 | length 61.4
  Top Layer w0.254: v1(34.25,83.375) 35.817,83.375 U5.13@35.827,83.365
  Bottom Layer w0.254: P3.2@20.45,45.7 20.45,46.05 13.894,52.606 13.894,81.719 15.55,83.375 v1(34.25,83.375)
IO20: P3.3 U5.14 | length 58.5
  Top Layer w0.254: v1(34.299,82.099) 34.303,82.095 U5.14@35.827,82.095
  Bottom Layer w0.254: P3.3@22.99,45.7 15.575,53.115 15.575,80.051 17.623,82.099 v1(34.299,82.099)
IO37-PWRKEY: R14.1 U5.26 | length 25.7
  Top Layer w0.254: v1(51.55,78.95) 51.55,80.833 U5.26@51.562,80.845 ; R14.1@51.824,64.551 51.824,65.704 51.973,65.853 55.693,65.853 v1(55.7,65.846)
  Bottom Layer w0.254: v1(51.55,78.95) 51.5,78.95 50.05,77.5 50.05,67.053 50.697,66.405 55.141,66.405 v1(55.7,65.846)
IO38: J2.5 U5.31 | length 32.5
  Top Layer w0.254: U5.31@53.327,87.175 57.851,87.175 58.751,86.275 v1(60.575,86.275)
  Bottom Layer w0.254: v1(60.575,86.275) 60.625,86.325 70.275,86.325 J2.5@81.009,97.059
IO39: J2.4 U5.32 | length 30
  Top Layer w0.254: U5.32@53.327,88.445 53.65,88.768 54.775,88.768 54.919,88.912 55.669,88.912 56.006,88.575 v1(56.7,88.575)
  Bottom Layer w0.254: v1(56.7,88.575) 57.85,87.425 68.916,87.425 J2.4@78.509,97.018
IO40: J2.3 U5.33 | length 27.1
  Top Layer w0.254: U5.33@52.933,89.789 v1(54.864,89.789)
  Bottom Layer w0.254: v1(54.864,89.789) 59.452,89.789 60.454,88.787 67.738,88.787 J2.3@76.16,97.209
IO41: J2.2 U5.34 | length 23.1
  Top Layer w0.254: U5.34@52.933,91.059 53.06,91.186 v1(56.388,91.186)
  Bottom Layer w0.254: v1(56.388,91.186) 64.161,91.186 64.856,91.881 68.556,91.881 73.184,96.509 73.184,96.801 73.401,97.018 J2.2@73.429,97.018
IO42: J2.1 U5.35 | length 20.3
  Top Layer w0.254: U5.35@52.933,92.329 v1(54.864,92.329)
  Bottom Layer w0.254: v1(54.864,92.329) 55.766,92.329 56.856,93.419 66.552,93.419 67.234,93.419 70.884,97.069 J2.1@70.884,97.409
IO46: U5.16 | length 1.8
  Top Layer w0.254: v2(38.848,79.048) 38.848,80.831 U5.16@38.862,80.845
NetC3_1: C3.1 C4.1 D1.1 D2.1 R1.1 U2.4 U2.8 | length 18
  Bottom Layer w2: v1(33.401,53.086) v1(33.401,52.451) 33.401,46.272 34.573,45.1 40.909,45.1 v3(43.18,47.371)
  other v3: 43.8,47.3 43.2,48.1
NetC5_1: C5.1 R17.1 R31.2 U1.2 U1.3 U1.4
NetC6_1: C6.1 R7.2 | length 3.1
  Top Layer w0.254: R7.2@28.102,61.002 28.176,60.928 30.796,60.928 30.969,61.101 C6.1@30.969,61.226
NetC6_2: C6.2 L1.1 U3.2 | length 25.4
  Top Layer w0.254: L1.1@27.784,77.978 27.784,76.241 28.625,75.4 28.625,65.833 30.86,63.598 30.86,63.249 31.208,62.901 C6.2@31.369,62.901
  Top Layer w0.6: U3.2@25.877,68.232 25.892,68.248 25.892,76.946
NetC7_1: C7.1 C8.1 C9.1 D3.1 R9.1 U3.3
NetC13_1: C13.1 R11.1 | length 2.1
  Top Layer w0.254: R11.1@22.858,60.915 22.985,61.042 C13.1@22.985,62.913
NetC13_2: C13.2 R10.2 R12.1 U3.4 | length 5.7
  Top Layer w0.254: R12.1@20.966,63.874 R12.1@21.075,63.983 ; R12.1@21.075,63.975 21.075,63.979 R12.1@21.075,63.983 ; R12.1@21.192,64.092 21.184,64.092 R12.1@21.075,63.983 ; R12.1@21.358,64.113 C13.2@22.985,64.113 23.072,64.026 23.816,64.026 24.048,63.794 R10.2@24.89,63.794 24.908,63.813 24.908,65.514 U3.4@24.927,65.532
NetD1_2: D1.2 R5.1 | length 1.7
  Top Layer w0.254: R5.1@41.994,57.956 42.2,58.162 42.2,59.35 D1.2@42.375,59.525
NetD2_2: D2.2 R4.1 | length 1.6
  Top Layer w0.254: R4.1@40.216,57.779 D2.2@40.216,59.366
NetD4_1: D4.1 R23.1 | length 3.4
  Top Layer w0.254: D4.1@76.938,40.259 79.976,40.259 R23.1@80.25,39.985
NetD5_1: D5.1 R24.1 | length 12.8
  Top Layer w0.254: R24.1@82.74,83.45 82.815,83.525 v1(84.95,83.525) ; v1(86.1,80.575) 86.1,73.412 D5.1@86.106,73.406
  Bottom Layer w0.254: v1(84.95,83.525) 84.95,81.753 86.1,80.603 v1(86.1,80.575)
NetD6_1: D6.1 R26.1 | length 2.8
  Top Layer w0.254: D6.1@61.136,79.756 61.224,79.756 61.468,79.512 R26.1@61.468,77.115
NetD7_1: D7.1 R31.1
NetJ3_C2: J3.C2 R25.1 | length 1.8
  Top Layer w0.254: J3.C2@68.551,21.601 68.58,21.63 R25.1@68.58,23.376
NetJ3_C3: J3.C3 R22.1 | length 1.8
  Top Layer w0.254: R22.1@65.913,23.384 65.913,21.699 J3.C3@66.011,21.601
NetJ3_C7: J3.C7 R21.2 | length 2
  Top Layer w0.254: R21.2@64.389,23.503 64.389,22.178 64.741,21.826 J3.C7@64.741,21.601
NETLIGHT: R28.1 U4.47 | length 43
  Top Layer w0.254: U4.47@69.147,67.51 69.147,65.897 69.8,65.244 73.335,65.244 74.441,66.35 87.098,66.35 87.13,66.382 v1(87.196,66.448) ; R28.1@84.074,86.072 84.074,85.126 v1(84.1,85.1)
  Bottom Layer w0.254: v1(84.1,85.1) 86.897,85.1 87.196,84.801 v1(87.196,66.448)
NetQ1_1: Q1.1 R14.2 R16.1 | length 3.1
  Top Layer w0.254: R16.1@51.788,61.468 51.751,61.431 53.269,61.431 Q1.1@53.275,61.425 ; R16.1@51.825,61.375 R14.2@51.825,62.75 ; R16.1@51.825,61.55 R16.1@51.925,61.45
NetQ1_3: Q1.3 R33.1 | length 6
  Top Layer w0.254: Q1.3@55.275,60.475 55.277,60.475 55.55,60.202 55.55,57.699 55.699,57.55 56.825,57.55 57.125,57.85 R33.1@57.125,59.185
NetQ2_1: Q2.1 R27.2 R29.1 | length 5.3
  Top Layer w0.254: R27.2@76.175,47.4 77.65,47.4 78.189,46.861 78.189,45.85 78.29,45.749 78.29,43.802 Q2.1@78.293,43.799
NetQ2_3: Q2.3 R23.2 | length 3.1
  Top Layer w0.254: Q2.3@77.343,41.799 77.542,41.6 79.992,41.6 R23.2@80.264,41.328
NetQ3_1: Q3.1 R28.2 R30.1 | length 3.8
  Top Layer w0.254: R30.1@81.867,89.027 81.867,87.483 Q3.1@81.975,87.375 82.075,87.275 R28.2@84.075,87.275
NetQ3_3: Q3.3 R24.2 | length 1.7
  Top Layer w0.254: R24.2@80.98,83.827 80.98,85.063 Q3.3@81.293,85.376
NetQ4_2: Q4.2 R17.2 | length 2.4
  Top Layer w1: Q4.2@44.075,58.21 44.043,58.242 44.043,60.475 44.075,60.475 R17.2@44.125,60.525
NetR2_2: R2.2 R3.1 U1.8 | length 5.8
  Top Layer w0.254: R3.1@39.38,69.02 39.38,69.701 39.394,69.715 39.394,70.088 39.6,70.294 R2.2@39.497,70.397 ; R2.2@39.6,70.4 39.6,70.513 39.77,70.683 40.092,70.683 42.184,72.775 U1.8@42.84,72.775
NetR6_1: R6.1 U2.2 | length 2.1
  Top Layer w0.254: R6.1@40.475,47.275 40.475,47.375 40.742,47.642 U2.2@40.742,49.303
NetR7_1: R7.1 U3.6 | length 3.1
  Top Layer w0.254: U3.6@26.827,65.532 26.827,64.51 27.603,63.734 27.603,63.423 27.886,63.139 R7.1@28.197,63.139
NetR8_2: R8.2 R10.1 R11.2 | length 4.9
  Top Layer w0.254: R11.2@22.858,58.815 23.058,58.815 24.617,60.374 24.617,60.442 R8.2@24.89,60.715 R10.1@24.89,62.794
NetR9_2: R9.2 R13.2 U3.5 | length 16.4
  Top Layer w0.254: R9.2@18.667,59.677 18.98,59.364 18.98,58.941 19.317,58.604 20.37,58.604 R13.2@20.643,58.877 ; R13.2@20.953,58.676 22.46,57.169 25.419,57.169 25.877,57.627 U3.5@25.877,65.532
PWRKEY: R33.2 U4.5 | length 2.7
  Top Layer w0.2: R33.2@57.125,60.815 57.46,61.15 U4.5@59.7,61.15
RF_ANT: E2.1 U4.41 | length 22.6
  Top Layer w0.643: U4.41@75.6,64.275 97.777,64.275 E2.1@98.044,64.008
RXD0: U5.36 UART.3 | length 9.2
  Top Layer w0.254: U5.36@53.327,93.525 53.65,93.848 54.511,93.848 54.643,93.98 v1(54.737,93.98)
  Bottom Layer w0.254: v1(54.737,93.98) 56.226,95.469 57.744,95.469 UART.3@59.675,97.4 ; UART.3@59.275,96.865 59.742,97.332 UART.3@60.125,96.95
RXD_AUX: R18.2 U4.24 | length 3.2
  Top Layer w0.2: U4.24@70.147,49.01 70.147,46.103 R18.2@70.325,45.925
SIM1_DATA: C32.1 R21.1 U4.21 | length 33.3
  Top Layer w0.2: U4.21@67.147,49.01 67.147,47.975 67.325,47.797 67.325,39.125 68.371,38.079 68.371,35.687 69.358,34.7 69.878,34.7 v1(71.403,33.174)
  Top Layer w0.254: v1(64.325,28.175) 64.325,26.723 64.131,26.529 64.389,26.271 R21.1@64.389,24.503
  Bottom Layer w0.254: v1(64.325,28.175) 64.325,31.764 65.016,32.455 71.255,32.455 71.403,32.603 v1(71.403,33.174)
SIM1_RST: C33.1 R25.2 U4.20 | length 25.8
  Top Layer w0.2: U4.20@66.147,49.01 66.051,48.914 66.051,38.524 67.125,37.45 67.125,34.525 67.486,34.164 67.486,33.525 67.847,33.164 67.847,32.653 68.425,32.075 68.425,31.154 68.716,30.863 68.716,26.162 68.58,26.026 R25.2@68.58,24.376
SIM1_VDD: C28.2 C30.1 J3.C1 U4.18 | length 34
  Top Layer w0.4: v1(63.825,33.7) 63.825,43.31 64.147,43.632 U4.18@64.147,49.01 ; v1(69.05,33.6) 71.575,31.075 71.575,26.625 71.575,24.304 71.25,23.979 71.25,21.76 J3.C1@71.091,21.601
  Bottom Layer w0.4: v1(63.825,33.7) 63.875,33.65 69,33.65 v1(69.05,33.6)
SIM_CLK: C29.1 R22.2 U4.19 | length 25.8
  Top Layer w0.2: U4.19@65.147,49.01 65.147,38.126 65.375,37.898 65.375,34.005 66.925,32.455 66.925,29.798 66.084,28.957 66.084,28.238 65.886,28.04 65.913,28.013 R22.2@65.913,24.384
SIM_GND: C28.1 J3.C5 U4.16 | length 32.6
  Top Layer w0.6: C28.1@69.999,24.3 C28.1@70.175,24.476
  Top Layer w0.7: U4.16@62.2,49.025 62.2,33.125 64.35,30.975 65.675,30.975 v1(65.725,30.925) ; J3.C5@69.871,21.651 C28.1@69.871,24.021 ; C28.1@69.999,24.3 v1(70,25.925)
  Top Layer w0.8: J3.C5@69.821,21.601 J3.C5@69.871,21.651 ; C28.1@69.871,24.021 C28.1@70,24.15
  Bottom Layer w0.7: v1(65.725,30.925) 67.492,30.925 70,28.417 v1(70,25.925)
SIM_PRESENCE: J3.CD R19.2 U4.37 | length 64.6
  Top Layer w0.254: v1(60.833,23.368) 60.833,21.699 J3.CD@60.931,21.601 ; U4.37@75.604,60.279 82.827,60.279 83.006,60.1 R19.2@83.006,60.081 ; v1(82.977,58.499) 83.006,58.528 R19.2@83.006,60.081 ; R19.2@83.1,60.175 R19.2@83.006,60.081
  Bottom Layer w0.254: v1(60.833,23.368) 60.862,23.368 61.155,23.075 76.365,23.075 76.514,23.224 76.514,38.835 81.075,43.396 81.075,53.4 82.977,55.302 v1@82.977,58.274
STDBY: R5.2 U2.6 | length 1.9
  Top Layer w0.254: U2.6@42.012,54.253 R5.2@42.012,56.188
TXD0: U5.37 UART.2 | length 10.5
  Top Layer w0.254: U5.37@53.327,94.795 53.582,95.05 60.765,95.05 61.517,95.802 61.517,96.673 UART.2@62.229,97.385
TXD_AUX: R20.2 U4.25 | length 5
  Top Layer w0.2: R20.2@71.05,44.15 71.2,44.3 71.2,45.024 71.304,45.128 71.304,46.722 71.2,46.826 U4.25@71.2,49.025
VBAT: C2.1 C20.2 C21.2 C22.2 C23.1 C24.1 C25.1 D5.2 P1.3 Q4.3 TP2.TP? TP5.TP? U2.5 U4.50 U4.51 | length 26.5
  Top Layer w2: 49.866,57.366 49.875,57.375 49.875,65.825 51.45,67.4 58.161,67.4 62.036,71.275 TP5.TP?@65.65,71.275
VDD_EXT: C17.1 R19.1 U4.43 | length 25.5
  Top Layer w0.254: U4.43@73.147,67.51 73.147,67.683 73.353,67.889 78.015,67.889 78.1,67.974 v1(79.663,67.974) ; R19.1@83.1,61.875 83.129,61.904 v1(83.129,62.767)
  Bottom Layer w0.254: v1(79.663,67.974) 73.965,67.974 73.816,67.825 73.816,67.159 78.257,62.718 81.103,62.718 81.151,62.767 v1(83.129,62.767)
VRTC: C31.2 R26.2 U4.52 | length 12.1
  Top Layer w0.254: R26.2@61.425,73.925 R26.2@61.5,73.85 ; U4.52@64.185,67.548 U4.52@64.193,67.556 ; v1(64.185,69.721) v1@64.193,69.714
  Top Layer w0.4: R26.2@61.5,73.85 v1(62.875,73.85) ; U4.52@64.193,67.556 v1@64.193,69.714
  Top Layer w1: C31.2@57.791,73.533 58.033,73.775 61.275,73.775 R26.2@61.425,73.925
  Bottom Layer w0.4: v1(62.875,73.85) 62.875,71.031 v1(64.185,69.721)
pads on no net: E2.2 J3.C6 P1.2 U1.9 U2.9 U4. U4.1 U4.2 U4.3 U4.4 U4.6 U4.7 U4.8 U4.9 U4.10 U4.11 U4.12 U4.13 U4.32 U4.35 U4.36 U4.38 U4.39 U4.46 U4.53 U4.54 U4.55 U4.56 U4.57 U4.58 U4.59 U4.60 U4.61 U4.62 U4.63 U4.64 U4.65 U4.66 U4.67 U4.68 U5.4 U5.5 U5.24 U5.25 U5.28 U5.29 U5.30 U5.38 U5.39

## Polygon pours and split planes (outlines as drawn)
NetD7_1 on Top Layer "NONET_L01_P-001" (solid, pour order 24): 45.625,64.675 45.625,62.025 47.125,62.025 47.604,62.025 47.604,64.675
NetC3_1 on Top Layer "NONET_L01_P-001" (solid, pour order 41): 39.604,57.081 39.624,56.134 39.751,56.134 39.918,56.134 39.918,54.038 38.481,54.038 38.577,51.778 37.846,51.816 35.052,51.816 34.5,51.816 32.375,51.816 32.512,60.96 34.925,63.373 38.608,63.373 43,63.373 43,61.211 39.516,61.231 39.496,61.211 39.599,57.113
GND on Top Layer "NONET_L01_P-001" (solid, remove dead copper, pour order 42): 1.081,99.91 2.986,99.91 89.981,99.91 89.981,-0.166 -0.57,-0.166 -0.57,93.306 -0.57,99.91
5V on Top Layer "5V_L01_P026" (solid, pour order 26): 45.025,61.7 46.925,61.7 46.925,57.65 45.025,57.65
VBAT on Top Layer "NONET_L01_P-001" (solid, remove dead copper, pour order 23): 42.9,57.075 47.599,57.075 48.641,54.991 49.022,54.61 49.022,53.394 42.9,53.394
NetC5_1 on Top Layer "NONET_L01_P-001" (solid, pour order 25): 47.731,68.305 43.652,68.305 43.652,66.399 43.23,66.399 43.23,61.627 44.768,61.627 44.768,65.102 47.731,65.102 47.731,66.399
VBAT on Top Layer "VBAT_L01_P040" (solid, pour order 40): 64.444,74.306 65.7,74.306 65.659,76.454 85.344,76.583 85.344,71.247 66.55,71.247 66.55,66.294 64.444,66.294
3V3 on Top Layer "NONET_L01_P-001" (solid, pour order 28): 47.289,71.697 43.432,71.697 43.403,72.678 42.362,72.678 42.005,72.495 41.21,71.7 39.2,71.7 38.475,71.7 38.475,74.55 47.289,74.55 47.289,73.3 47.289,72.8
NetC7_1 on Top Layer "NONET_L01_P-001" (solid, pour order 35): 17.2,61.123 19.177,61.087 19.177,64.516 20.701,64.516 23.622,67.183 25.273,67.183 25.273,75.184 17.2,75.184
3V3 on Top Layer "NONET_L01_P-001" (solid, pour order 30): 71.755,41.656 76.075,41.656 76.075,39.497 71.755,39.497
3V3 on Top Layer "NONET_L01_P-001" (solid, pour order 29): 72.644,50.292 71.825,50.292 71.825,41.656 72.136,41.656 72.39,41.656 73.66,41.656 73.66,41.783 73.66,41.91 73.66,47.117 72.644,47.117 72.517,47.244
VBAT on Top Layer "NONET_L01_P-001" (solid, pour order 31): 64.444,74.306 65.7,74.306 65.659,76.454 85.344,76.583 85.344,71.247 66.55,71.247 66.55,66.294 64.444,66.294
5V on Top Layer "NONET_L01_P-001" (solid, pour order 27): 31.748,80.01 29.85,80.01 29.85,64.15 30.246,63.754 37.4,63.754 37.4,72.582 37.211,72.771 37.211,72.898 32.512,72.898 31.877,73.533 31.535,73.533
VBAT on Top Layer "NONET_L01_P-001" (solid, pour order 22): 54.325,56.992 54.325,56.125 51.435,56.125 51.435,53.975 47.12,53.975 47.12,58.636 54.325,58.636
NetC3_1 on Top Layer "NONET_L01_P-001" (solid, pour order 34): 44.573,51.054 44.573,46.736 42.672,46.736 42.672,51.054
NetC6_2 on Top Layer "NONET_L01_P-001" (solid, pour order 39): 28.702,79.629 28.702,79.502 28.702,75.819 25.527,75.819 25.146,76.2 25.146,81.28 28.448,81.28 28.702,81.28
+12 on Top Layer "NONET_L01_P-001" (solid, pour order 37): 3.81,76.962 12.925,76.962 12.925,67.564 3.81,67.564
GND on Bottom Layer "NONET_L01_P-001" (solid, remove dead copper, pour order 36): 1.608,99.715 3.513,99.715 90,99.715 90,-0.361 -0.043,-0.361 -0.043,93.111 -0.043,99.715
NetC3_1 on Bottom Layer "NONET_L01_P-001" (solid, pour order 32): 32.639,51.943 34.163,51.943 34.163,53.594 32.639,53.594
3V3 on Bottom Layer "NONET_L01_P-001" (solid, pour order 33): 71.755,42.037 73.125,42.037 73.125,37.846 71.755,37.846

## Keep-outs
Keep-Out Layer:
  lines w0.2: -0.127,2.875 ccw(c2.875,2.875) 2.875,-0.127 97.125,-0.127 ccw(c97.125,2.875) 100.127,2.875 100.127,100 ccw(c100,100) 99.873,100 99.873,98.335 ccw(c97.125,97.125) 97.125,100.127 2.876,100.127 2.875,100.127 ccw(c2.875,97.125) -0.127,97.127 -0.127,97.125 -0.127,2.875

## Silkscreen, mask and mechanical layers (free items; w line width, h text height)
Top Overlay:
  drawing of 14 lines, arcs and shapes, not listed
  text "B0T 1.0 -BCA-08.25" at 97.602,37.946 h3 r270
Bottom Overlay:
  drawing of 15 lines, arcs and shapes, not listed
  text "Baris Can Akyildiz" at 98.037,10.479 h1.52 r270
  text "Trust Me, I'm a PCB" at 60.446,1.562 h1.52
Mechanical 1:
  lines w0.254: 97.1,0 2.875,0 cw(c2.875,2.875) 0,2.875 0,97.125 cw(c2.875,97.125) 2.875,100 97.125,100 cw(c97.125,97.125) 100,97.125 ; 97.125,0 ccw(c97.125,2.875) 100,2.875 100,100
Top Component Center:
  drawing of 191 lines, arcs and shapes, not listed
  text "Layer" at 105.943,94.993 h1.43
  text "Name" at 115.761,94.993 h1.43
  text "Material" at 137.993,94.993 h1.43
  text "Thickness" at 158.554,94.993 h1.43
  text "Constant" at 174.102,94.993 h1.43
  text "Board Layer Stack" at 187.74,94.993 h1.43
  text "Top Overlay" at 115.761,92.128 h1.43
  text "Top Solder" at 115.761,89.262 h1.43
  text "Solder Resist" at 137.993,89.262 h1.43
  text "0,010mm" at 158.554,89.262 h1.43
  text "3.5" at 174.102,89.262 h1.43
  text "1" at 105.943,86.397 h1.43
  text "Top Layer" at 115.761,86.397 h1.43
  text "0,036mm" at 158.554,86.397 h1.43
  text "Dielectric 1" at 115.761,83.531 h1.43
  text "FR-4" at 137.993,83.531 h1.43
  text "1,465mm" at 158.554,83.531 h1.43
  text "4.8" at 174.102,83.531 h1.43
  text "2" at 105.943,80.666 h1.43
  text "Bottom Layer" at 115.761,80.666 h1.43
  text "0,036mm" at 158.554,80.666 h1.43
  text "Bottom Solder" at 115.761,77.8 h1.43
  text "Solder Resist" at 137.993,77.8 h1.43
  text "0,010mm" at 158.554,77.8 h1.43
  text "3.5" at 174.102,77.8 h1.43
  text "Bottom Overlay" at 115.761,74.935 h1.43
  text "Total board thickness:" at 105.943,72.07 h1.43
  text "1,556mm" at 158.554,72.07 h1.43

## Text inside footprints (layer, text, board x,y; h text height)
E1: Bottom 3D Body "Bottom Antipad is not present in the footprint" at 66.788,53.394 h0.81 r90; Bottom 3D Body "to allow routing" at 68.414,53.394 h0.81 r90
U5: Top 3D Body "ANTENNA" at 40.077,102.845 h1.27